# Allegro board LOA_09Jul25.brd
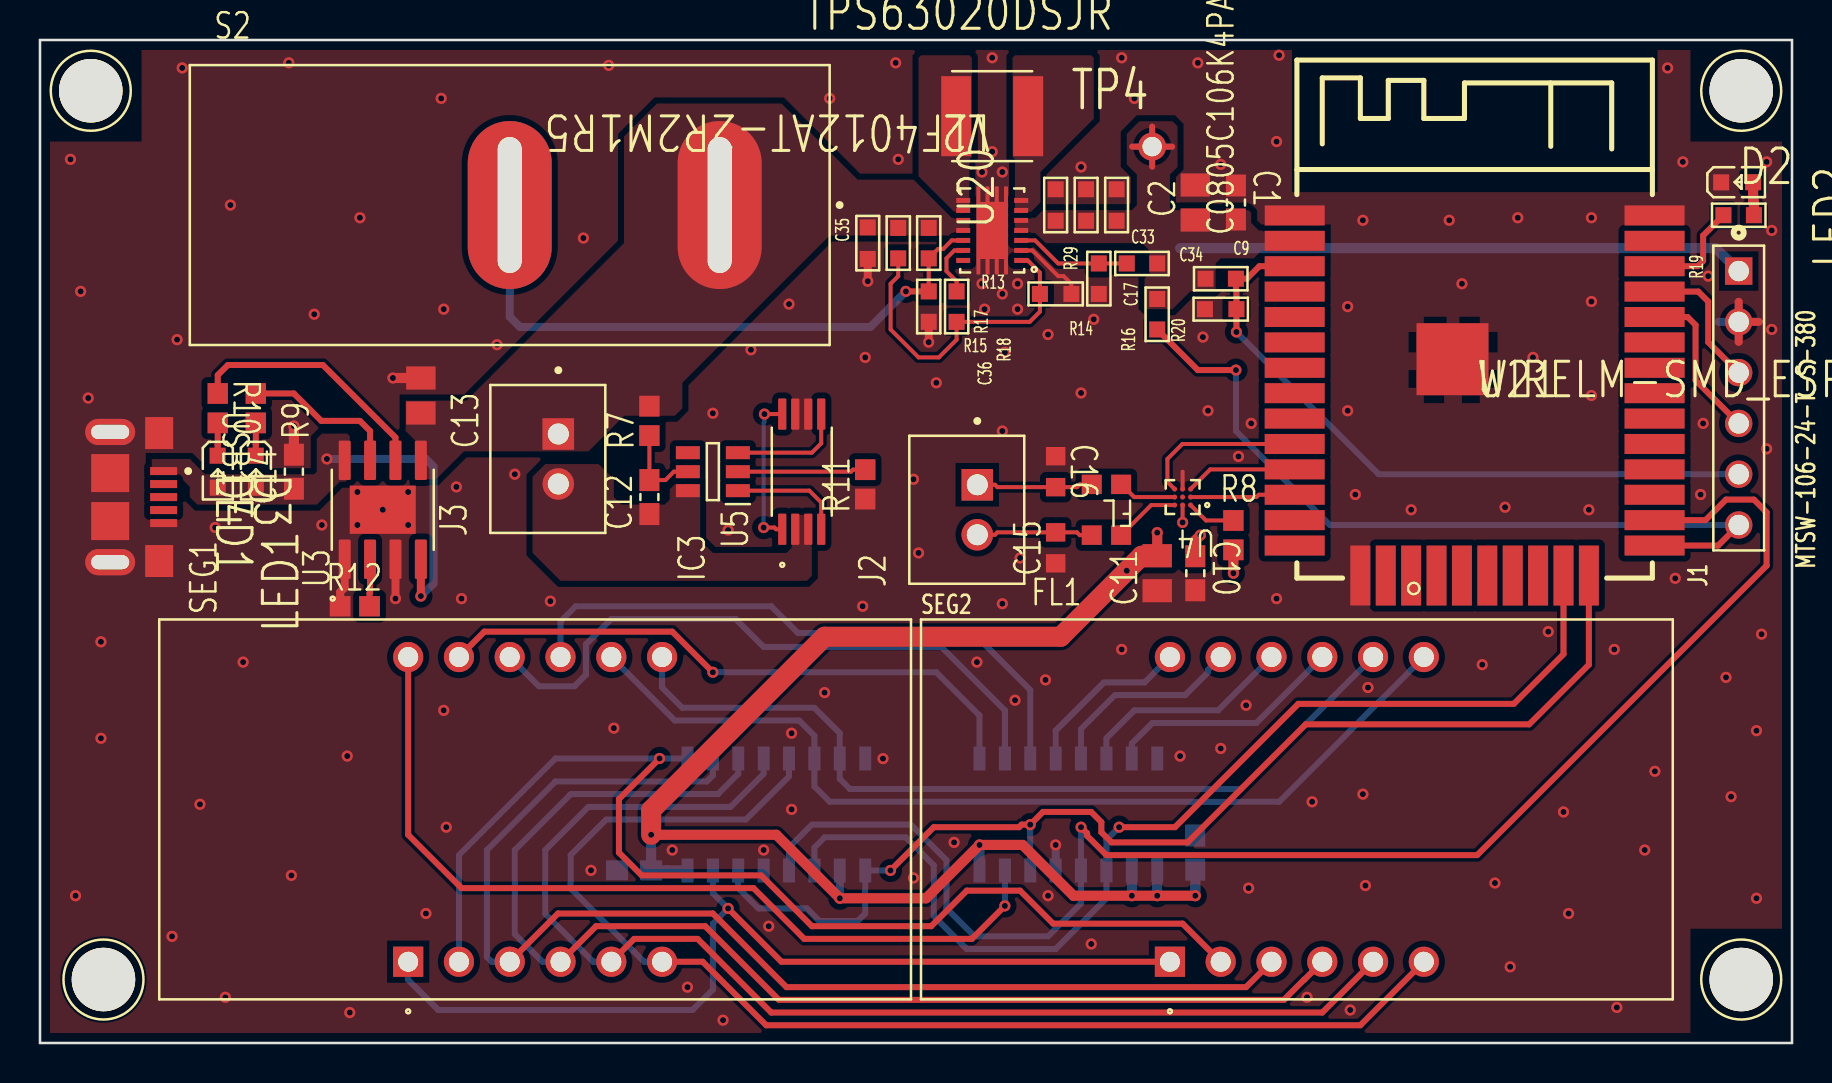
[diagram p0: board, top side]
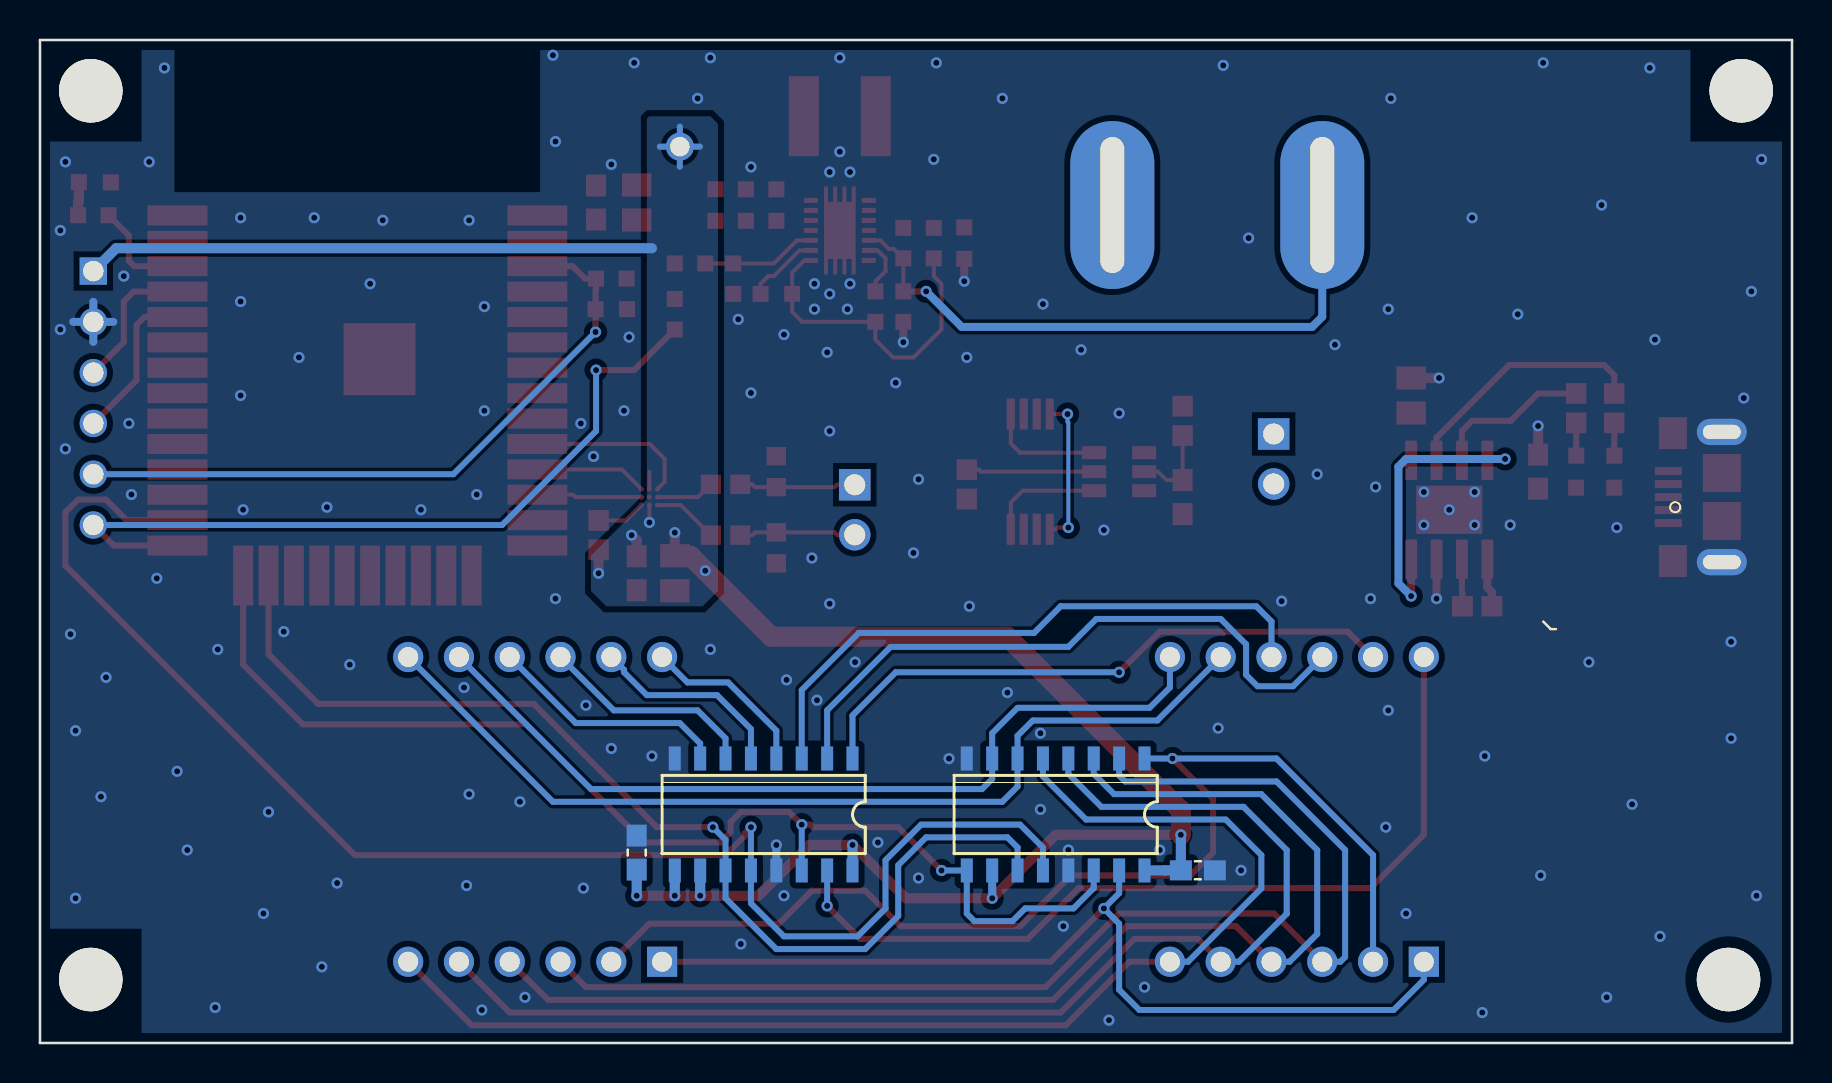
[diagram p1: board, bottom side, seen from below]

Outline 87.63 x 50.16 mm; copper layers: TOP, BOTTOM. Coordinates in mm from the lower left corner of the outline.
Outline path: 0,50.16 0,0 87.63,0 87.63,50.16 0,50.16

## Design rules (mm)
constraint set DEFAULT: min track width 0.3, pair gap 0.203

## Placement (name value [footprint] x y rotation side)
C1  C0603C104J3RACTU  [CAPC1608X90]  59.82 42.04 270 top
C2  C0805C106K4PAC  [CAPC2012X140N]  57.79 42.04 90 top
C3  C0603C104K3RACTU  [CAPC1608X90]  29.72 8.64 180 bottom
C4  C0603C104K3RACTU  [CAPC1608X90]  57.79 9.53 90 bottom
C9  100nF  [C0603]  59.84 36.7 180 top
C10  C0603C104J3RACTU  [CAPC1608X90]  57.79 23.5 270 top
C11  C0805C106K4PAC  [CAPC2012X140N]  55.88 23.5 90 top
C12  C0603C104J3RACTU  [CAPC1608X90]  30.48 27.3 90 top
C13  C0805C106K4PAC  [CAPC2012X140N]  19.05 32.38 270 top
C14  C0603C104J3RACTU  [CAPC1608X90]  12.7 28.57 90 top
C15  C0603C221J3GACTU  [CAPC1608X87N]  50.8 24.77 90 top
C16  C0603C221J3GACTU  [CAPC1608X87N]  50.8 28.57 270 top
C17  10uF 10V  [C0603]  50.8 41.12 90 top
C33  10uF 10V  [C0603]  52.32 41.12 90 top
C34  10uF 10V  [C0603]  53.85 41.12 90 top
C35  10uF 25V  [C0603]  41.4 40.79 270 top
C36  100nF 10V  [C0603]  50.01 37.46 0 top
D2  LED2  [LED0603-RD_RED]  84.89 43.05 0 top
D3  LED1  [LED0603-RD_RED]  10.79 28.57 270 top
D4  LED1  [LED0603-RD_RED]  8.89 28.57 270 top
FL  -  [BLM18AG121SN1D]  53.34 27.94 180 top
FL1  -  [BLM18AG121SN1D]  53.34 25.4 180 top
IC1  74HC595  [SO16]  36.83 11.43 0 bottom
IC3  DW01A-G  [SOT95P280X135-6N]  33.65 28.57 180 top
IC4  74HC595  [SO16]  51.43 11.43 0 bottom
J1  BBS-106-X-X  [SAMTEC_MTSW-106-24-T-S-380]  84.96 32.26 90 top
J2  B2B-XH-A_(LF)(SN)  [B2B-XH-A_LFSN]  46.35 26.67 90 top
J3  B2B-XH-A_(LF)(SN)  [B2B-XH-A_LFSN]  25.4 29.21 90 top
L2  VLF4012AT-2R2M1R5  [IND-SMD_L4_0-W4_0_LQH44PN2R2MP0L]  47.62 46.35 180 top
NOREF  -  []  -124.33 -104.01 0 top
NOREF#2  -  [unnamed#2]  3.17 3.18 270 top
NOREF#3  -  [unnamed#2]  85.09 47.62 270 top
NOREF#4  -  []  0 0 90 top
NOREF#5  -  [unnamed#2]  85.09 3.18 270 top
NOREF#6  -  [unnamed#2]  2.54 47.62 270 top
NOREF#7  -  []  0 0 0 top
R7  RC0603FR-07100RL  [RESC1607X60N]  30.48 31.11 90 top
R8  RC0603FR-071ML  [RESC1607X60N]  59.69 25.4 270 top
R9  RC0603FR-071KL  [RESC1607X60N]  10.79 31.75 270 top
R10  RC0603FR-071KL  [RESC1607X60N]  8.89 31.75 270 top
R11  RC0603FR-071KL  [RESC1607X60N]  41.27 27.94 90 top
R12  RC0603FR-071K2L  [RESC1607X60N]  15.75 21.84 0 top
R13  NC  [R0603]  44.45 39.24 90 top
R14  1M  [R0603]  54.36 38.99 0 top
R15  10K  [R0603]  44.45 36.07 90 top
R16  200K  [R0603]  52.96 37.46 90 top
R17  100  [R0603]  42.93 39.24 90 top
R18  0  [R0603]  45.85 36.07 90 top
R19  330  [R0603]  84.2 41.4 0 top
R20  10K  [R0603]  58.29 38.23 0 top
R29  10K  [R0603]  55.88 37.21 270 top
S2  RB141C1100  [SW_RB141C1100]  23.49 41.91 0 top
SEG1  LED 7 SEG  [LED_BA56-12SRWA]  24.77 11.68 0 top
SEG2  LED 7 SEG  [LED_BA56-12SRWA]  62.87 11.68 0 top
TP4  TP4  [TP]  55.63 44.83 180 top
U3  TP4056_U3  [SOP127P600X175-9N]  17.14 26.67 90 top
U4  MAX98357AEWL+T  [BGA9N40P3X3_134X143X69N]  57.15 27.3 180 top
U5  8205A-VB  [SOP65P640X120-8N]  38.1 28.57 90 top
U20  TPS63020DSJR  [VSON-14_L4_0-W3_0-P0_50-BL-EP_TI_DSJ]  47.62 40.64 90 top
U21  -  [WIRELM-SMD_ESP32-S]  71.76 32.38 0 top
USB1  2013499-1  [TE_2013499-1]  3.51 27.3 270 top

## Library data of the parts
C1 = C0603C104J3RACTU_C1
C2 = C0805C106K4PAC_C2
C3 = C0603C104K3RACTU_C3
C4 = C0603C104K3RACTU_C4
C9 C17 C33-C36 = CAP NP
C10 = C0603C104J3RACTU_C10
C11 = C0805C106K4PAC_C11
C12 = C0603C104J3RACTU_C12
C13 = C0805C106K4PAC_C13
C14 = C0603C104J3RACTU_C14
C15 = C0603C221J3GACTU_C15
C16 = C0603C221J3GACTU_C16
D2-D4 = LED
FL = BLM18AG121SN1D_FL
FL1 = BLM18AG121SN1D_FL1
IC1 IC4 = 74HC595_IC1_0
IC3 = DW01A-G_IC3
J1 = CON6
J2 = B2B-XH-A__LF__SN__J2
J3 = B2B-XH-A__LF__SN__J3
L2 = VLF4012AT-2R2M1R5
R7 = RC0603FR-07100RL_R7
R8 = RC0603FR-071ML_R8
R9 = RC0603FR-071KL_R9
R10 = RC0603FR-071KL_R10
R11 = RC0603FR-071KL_R11
R12 = RC0603FR-071K2L_R12
R13-R20 R29 = RESISTOR
S2 = RB141C1100
SEG1 SEG2 = Component_1_*1_0
TP4 = T POINT S
U3 = TP4056_U3_0
U4 = MAX98357AEWL+T_U4
U5 = 8205A-VB_U5
U20 = COPY_2
U21 = ESP32-WROOM-32D_0
USB1 = 2013499-1_USB1

## Footprints (pads in the part's own frame, mm; a bottom-side part is the same pattern mirrored in y, then rotated)
B2B-XH-A_LFSN
  rect 1.575x1.575 hole 1.05: 1(1.25,-0.525)
  round 1.575 hole 1.05: 2(-1.25,-0.525)
BGA9N40P3X3_134X143X69N
  round 0.25 smd: A1(-0.4,0.4) A2(0,0.4) A3(0.4,0.4) B1(-0.4,0) B2(0,0) B3(0.4,0) C1(-0.4,-0.4) C2(0,-0.4) C3(0.4,-0.4)
BLM18AG121SN1D
  rect 1x0.97 smd: 1(-0.735,0) 2(0.735,0)
C0603
  rect 0.8x0.8 smd: 1(0,0) 2(1.575,0)
CAPC1608X87N
  rect 0.92x0.97 smd: 1(-0.775,0) 2(0.775,0)
CAPC1608X90
  rect 1.1x1 smd: 1(-0.85,0) 2(0.85,0)
CAPC2012X140N
  rect 1.16x1.47 smd: 1(-0.875,0) 2(0.875,0)
IND-SMD_L4_0-W4_0_LQH44PN2R2MP0L
  rect 1.5x4 smd: 1(-1.8,0) 2(1.8,0)
LED0603-RD_RED
  rect 0.8x0.8 smd: 1(-0.8,-0.003) 2(0.799,0.004)
LED_BA56-12SRWA
  rect 1.508x1.508 hole 1: 1(-6.35,-7.62)
  round 1.508 hole 1: 2(-3.81,-7.62) 3(-1.27,-7.62) 4(1.27,-7.62) 5(3.81,-7.62) 6(6.35,-7.62) 7(6.35,7.62) 8(3.81,7.62) 9(1.27,7.62) 10(-1.27,7.62) 11(-3.81,7.62) 12(-6.35,7.62)
R0603
  rect 0.8x0.8 smd: 1(0,0) 2(1.524,0)
RESC1607X60N
  rect 1.04x1.02 smd: 1(-0.735,0) 2(0.735,0)
SAMTEC_MTSW-106-24-T-S-380
  rect 1.37x1.37 hole 1.02: 1(6.35,0)
  round 1.37 hole 1.02: 2(3.81,0) 3(1.27,0) 4(-1.27,0) 5(-3.81,0) 6(-6.35,0)
SO16
  rect 0.6x1.2 smd: 1(-4.445,-2.8) 2(-3.175,-2.8) 3(-1.905,-2.8) 4(-0.635,-2.8) 5(0.635,-2.8) 6(1.905,-2.8) 7(3.175,-2.8) 8(4.445,-2.8) 9(4.445,2.8) 10(3.175,2.8) 11(1.905,2.8) 12(0.635,2.8) 13(-0.635,2.8) 14(-1.905,2.8) 15(-3.175,2.8) 16(-4.445,2.8)
SOP65P640X120-8N
  custom 1.56x0.41 smd: 1(-2.88,0.975) 2(-2.88,0.325) 3(-2.88,-0.325) 4(-2.88,-0.975) 5(2.88,-0.975) 6(2.88,-0.325) 7(2.88,0.325) 8(2.88,0.975)
SOP127P600X175-9N
  custom 1.97x0.6 smd: 1(-2.475,1.905) 2(-2.475,0.635) 3(-2.475,-0.635) 4(-2.475,-1.905) 5(2.475,-1.905) 6(2.475,-0.635) 7(2.475,0.635) 8(2.475,1.905)
  rect 2.413x3.302 smd: 9(0,0)
SOT95P280X135-6N
  rect 1.2x0.65 smd: 1(-1.25,0.95) 2(-1.25,0) 3(-1.25,-0.95) 4(1.25,-0.95) 5(1.25,0) 6(1.25,0.95)
SW_RB141C1100
  oval 4.2x8.4 hole 1.2x6.8: 1(10.5,0) 2(0,0)
TE_2013499-1
  rect 0.4x1.35 smd: 1(-1.3,2.675) 2(-0.65,2.675) 3(0,2.675) 4(0.65,2.675) 5(1.3,2.675)
  rect 1.6x1.4 smd: SH1(-3.2,2.45) SH4(3.2,2.45)
  rect 1.9x1.9 smd: SH2(-1.2,0) SH3(1.2,0)
  oval 1.31x2.5 hole 0.71x1.9: SH5(3.255,0) SH6(-3.255,0)
TP
  round 1.397 hole 0.965: 1(0,0)
unnamed#2
  round 3.175 hole 3.2 unplated: (0,0)
VSON-14_L4_0-W3_0-P0_50-BL-EP_TI_DSJ
  rect 0.25x0.7 smd: 1(-1.5,-1.45) 2(-1,-1.45) 3(-0.5,-1.45) 4(0,-1.45) 5(0.5,-1.45) 6(1,-1.45) 7(1.5,-1.45) 8(1.5,1.45) 9(1,1.45) 10(0.5,1.45) 11(0,1.45) 12(-0.5,1.45) 13(-1,1.45) 14(-1.5,1.45)
  custom 4.4x1.58 smd: 15(0,0)
WIRELM-SMD_ESP32-S
  rect 3x1 smd: 1(-9,9.005) 2(-9,7.735) 3(-9,6.465) 4(-9,5.195) 5(-9,3.925) 6(-9,2.655) 7(-9,1.385) 8(-9,0.115) 9(-9,-1.155) 10(-9,-2.425) 11(-9,-3.695) 12(-9,-4.965) 13(-9,-6.235) 14(-9,-7.505) 25(9,-7.505) 26(9,-6.235) 27(9,-4.965) 28(9,-3.695) 29(9,-2.425) 30(9,-1.155) 31(9,0.115) 32(9,1.385) 33(9,2.655) 34(9,3.925) 35(9,5.195) 36(9,6.465) 37(9,7.735) 38(9,9.005)
  rect 1x3 smd: 15(-5.715,-9.005) 16(-4.445,-9.005) 17(-3.175,-9.005) 18(-1.905,-9.005) 19(-0.635,-9.005) 20(0.635,-9.005) 21(1.905,-9.005) 22(3.175,-9.005) 23(4.445,-9.005) 24(5.715,-9.005)
  rect 3.6x3.6 smd: 39(-1.105,1.815)

## Nets
+3V3: C1.2 C2.1 C3.1 C4.1 C10.1 C11.2 C17.1 C33.1 C34.1 IC1.10 IC1.16(VCC) IC4.9 IC4.10 IC4.16(VCC) J1.1 R8.2 R14.2 R20.1 R29.1 TP4.1(TP) U4.A2(VDD) U20.4 U20.5(VOUT2) U21.2
GND: C1.1 C2.2 C3.2 C4.2 C9.2 C10.2 C11.1 C13.1 C14.2 C15.1 C16.1 C17.2 C33.2 C34.2 C35.2 C36.2 D2.1(CATHODE) IC1.8 IC1.13 IC4.8 IC4.13 J1.2 R11.1 R12.1 R15.1 R16.1 U3.1 U3.3 U3.9 U4.C2 U5.6 U5.7(S23) U20.2 U20.15 U21.1 U21.15 U21.38 U21.39 USB1.5 USB1.SH1 USB1.SH2 USB1.SH3 USB1.SH4 USB1.SH5 USB1.SH6
+5: C14.1 D3.2 D4.2 U3.4(VCC) U3.8 USB1.1(VBUS)
BATT+: C13.2 C35.1 J3.1 R7.2 R13.2 R17.2 S2.1 U3.5 U20.10 U20.11
BATT-: C12.1 IC3.6 J3.2 U5.2 U5.3
BCLK: U4.C1 U21.11
CS: IC3.2 R11.2
D1: IC4.15 SEG1.12
D2: IC4.1 SEG1.11
D3: IC4.2 SEG1.10
D4: IC4.3 SEG1.9
D5: IC4.4 SEG2.12
D6: IC4.5 SEG2.11
D7: IC4.6 SEG2.10
D8: IC4.7 SEG2.9
DIN: U4.B1 U21.12
DIO: IC1.9 IC1.14 IC4.14 U21.24
ESP_BOOT: J1.6 R29.2 U21.25
ESP_EN: C9.1 J1.5 R20.2 U21.3
ESP_LED: R19.1 U21.36
G1: IC3.3 U5.5
G2: IC3.1 U5.4
LRC: U4.C3 U21.10
PWR_EN: R13.1 R15.2 S2.2 U20.12
RCLK: IC1.12 IC4.12 U21.26
SCLK: IC1.11 IC4.11 U21.23
SD: R8.1 U4.A1
U0RXD: J1.4 U21.34
U0TXD: J1.3 U21.35(TXD0)
N00271: IC1.6 SEG1.8 SEG2.7
N00279: IC1.7 SEG1.7 SEG2.8
N00393: FL.1 U4.B3
N00395: FL1.1 U4.A3
N00411: IC1.1 SEG1.2 SEG2.2
N00417: IC1.2 SEG1.3(P) SEG2.3(P)
N00423: IC1.15 SEG1.1 SEG2.1
N00429: IC1.3 SEG1.4 SEG2.4
N00431: IC1.4 SEG1.5 SEG2.5
N00433: IC1.5 SEG1.6 SEG2.6
N00511: D3.1(CATHODE) R9.2
N00513: D4.1(CATHODE) R10.2
N00523: R10.1 U3.6
N00529: R9.1 U3.7
N00547: R12.2 U3.2
N00607: C12.2 IC3.5(VCC) R7.1
N00647: C15.2 FL1.2 J2.2
N00649: C16.2 FL.2 J2.1
N011813: U5.1 U5.8
N420839: R14.1 R16.2 U20.3
N421111: L2.1 U20.6 U20.7
N421115: L2.2 U20.8 U20.9
N421175: R18.2 U20.13
N421245: C36.1 R17.1 R18.1 U20.1
N578148: D2.2 R19.2

Pads without a net: IC3 4; U4 B2; U20 14; U21 4 5 6 7 8 9 13 14 16 17 18 19 20 21 22 27 28 29 30 31 32 33 37; USB1 2 3 4

## Via types
v1: diameter 0.559, hole 0.305, TOP to BOTTOM, 178 vias

## Routing (per net, layer and track width the routed paths; a pad name or vN(x,y) marks a point on that pad's centre or on a via; arc(x,y) is an arc through that point)
+3V3: length 113.4
  TOP w0.2: U4.A2 v1(57.15,26.04)
  TOP w0.3: TP4.1 56.63,44.83 ; TP4.1 55.63,45.83 ; TP4.1 55.63,43.83 ; TP4.1 54.62,44.83
  TOP w0.508: v1(30.57,10.41) 36.83,10.41 v1(40,7.24) 44.32,7.24 v1(46.99,9.91) 49.15,9.91 51.69,7.37 v1(54.61,7.37) v1(55.88,7.37) v1(57.79,7.37) ; R8.2 v1(59.69,23.5) ; C10.1 57.79,25.15 v1(58.04,25.4) ; C11.2 v1(55.88,25.53)
  TOP w1: v1(30.57,10.41) 30.57,11.64 39.24,20.32 51.05,20.32 v1(54.36,23.62) 55.1,24.37 C11.2
  BOTTOM w0.3: 54.62,44.83 TP4.1 ; TP4.1 55.63,45.83 ; TP4.1 55.63,43.83 ; TP4.1 56.63,44.83
  BOTTOM w0.4: IC1.10 v1(40,7.24)
  BOTTOM w0.508: 57.02,39.75 83.82,39.75 J1.1 ; IC4.16 v1(46.99,9.91) ; 57.79,8.67 v1(57.79,7.37) ; 55.88,8.63 v1(55.88,7.37) ; IC1.16 31.38,8.63 31.37,8.64 C3.1 v1(30.57,10.41) ; IC4.10 v1(54.61,7.37)
GND: length 22.2
  TOP w0.2: U20.2 49.64,39.64 50.93,38.35 51.2,38.35 51.59,37.97 C36.2 ; 57.15,27.71 57.15,28.57
  TOP w0.4: J1.2 85.96,36.07 ; J1.2 84.96,37.07 ; J1.2 84.96,35.07 ; C35.2 v1(41.4,38.1) ; R15.1 v1(44.45,35.05) ; U3.3 v1(17.78,22.23) ; 15.24,24.2 15.24,22.78 15.01,22.55 R12.1
  TOP w0.508: C14.2 v1(12.7,30.86) ; C13.1 v1(17.65,33.26)
  BOTTOM w0.4: IC4.13 v1(50.8,9.91) ; J1.2 84.96,37.07 ; J1.2 85.96,36.07 ; J1.2 84.96,35.07 ; J1.2 83.96,36.07
  vias: v1(1.52,44.2) v1(1.78,7.37) v1(2.03,37.59) v1(2.41,32.26) v1(3.05,20.07) v1(3.05,15.24) v1(6.6,5.33) v1(6.86,35.18) v1(7.11,48.77) v1(8,11.94) v1(8.76,25.78) v1(9.27,2.29) v1(9.53,41.91) v1(10.16,19.05) v1(12.45,49.02) v1(12.57,8.38) v1(13.72,36.45) v1(14.1,25.91) v1(15.37,14.35) v1(15.49,1.52) v1(15.87,27.56) v1(15.87,25.91) v1(16,41.27) v1(17.14,26.67) v1(18.41,27.56) v1(18.41,25.91) v1(19.3,6.48) v1(20.07,47.24) v1(20.19,36.7) v1(20.19,16.64) v1(20.32,10.79) v1(20.83,27.81) v1(21.08,22.23) v1(22.86,34.92) v1(23.75,28.45) v1(25.53,22.1) v1(27.18,40.26) v1(27.56,8.64) v1(28.45,48.89) v1(28.7,15.75) v1(31.62,9.65) v1(32.38,2.79) v1(33.65,31.5) v1(34.16,1.14) v1(34.42,25.65) v1(35.56,34.67) v1(36.2,9.65) v1(36.45,5.84) v1(37.46,36.96) v1(37.59,15.49) v1(37.59,11.68) v1(39.24,17.53) v1(39.5,47.24) v1(41.15,21.84) v1(41.27,34.29) v1(42.16,14.22) v1(42.8,49.02) v1(42.93,44.2) v1(43.69,28.19) v1(43.69,8.25) v1(43.94,24.51) v1(44.83,33.02) v1(45.72,10.03) v1(46.86,19.05) v1(47.12,43.56) v1(47.12,37.97) v1(47.24,36.7) v1(47.62,49.28) v1(47.62,44.58) v1(48.13,43.56) v1(48.13,37.46) v1(48.13,30.61) v1(48.13,21.97) v1(48.26,34.54) v1(48.77,17.14) v1(48.89,37.97) v1(48.89,36.7) v1(49.02,24.26) v1(50.29,18.16) v1(50.42,35.43) v1(50.42,7.37) v1(52.07,43.81) v1(52.07,32.51) v1(52.58,4.95) v1(52.7,36.2) v1(54.1,49.28) v1(54.1,19.69) v1(54.74,47.24) v1(57.02,14.35) v1(57.91,49.02) v1(58.17,35.31) v1(58.42,31.62) v1(59.05,43.94) v1(59.05,14.73) v1(59.94,29.34) v1(60.32,16.89) v1(60.45,7.75) v1(60.58,30.99) v1(61.85,45.09) v1(61.85,22.23) v1(61.98,49.4) v1(63.37,2.29) v1(63.63,12.06) v1(65.41,36.83) v1(65.41,31.62) v1(65.53,1.65) v1(65.79,27.43) v1(66.17,41.15) v1(66.17,12.45) v1(66.29,7.87) v1(66.42,17.78) v1(68.58,26.67) v1(70.48,41.15) v1(71.12,37.97) v1(72.14,18.92) v1(72.77,8) v1(73.28,26.8) v1(73.53,3.81) v1(73.91,41.27) v1(74.68,34.29) v1(75.44,20.57) v1(76.2,11.56) v1(76.45,6.48) v1(77.47,26.67) v1(77.6,41.27) v1(77.6,37.08) v1(77.6,32.38) v1(78.74,19.69) v1(78.87,1.78) v1(80.26,9.65) v1(80.77,13.59) v1(81.41,48.77) v1(81.79,23.24) v1(82.17,44.07) v1(83.06,27.43) v1(83.19,30.99) v1(83.44,38.35) v1(84.33,18.29) v1(84.58,12.32) v1(85.85,15.62) v1(85.85,7.24) v1(86.11,20.45) v1(86.36,44.07) v1(86.36,29.72) v1(86.61,40.64) v1(86.61,35.69)
+5: length 14.1
  TOP w0.4: U3.4 v1(19.05,22.35)
  BOTTOM w0.4: v1(19.05,22.35) 19.69,22.99 19.69,28.83 19.3,29.21 v1(14.35,29.21)
BCLK: length 5.6
  TOP w0.2: U21.11 58.54,28.69 57.55,27.71
CS: length 6.4
  TOP w0.2: R11.2 40.66,28.68 40.56,28.57 IC3.2
D1: length 43.3
  TOP w0.3: v1(48.26,6.86) 46.61,5.21 38.23,5.21 35.69,7.75 21.08,7.75 18.41,10.41 SEG1.12
  BOTTOM w0.3: v1(48.26,6.86) IC4.15
D2: length 30.5
  TOP w0.3: SEG1.11 22.23,20.57 31.62,20.57 v1(33.65,18.54)
  BOTTOM w0.3: v1(33.65,18.54) 44.83,18.54 46.99,16.38 IC4.1
D3: length 32
  BOTTOM w0.3: SEG1.10 24.96,17.84 26.73,17.84 27.3,18.42 27.3,19.94 28.57,21.21 34.8,21.21 36.2,19.81 45.09,19.81 48.26,16.64 IC4.2
D4: length 30.7
  BOTTOM w0.3: SEG1.9 26.03,21.08 26.8,21.84 36.58,21.84 37.91,20.51 46.67,20.51 49.53,17.65 IC4.3
D5: length 8.6
  BOTTOM w0.3: SEG2.12 55.24,18.03 53.21,18.03 50.8,15.62 IC4.4
D6: length 10
  BOTTOM w0.3: IC4.5 52.07,15.7 53.77,17.4 57.28,17.4 58.42,18.54 58.42,18.66 SEG2.11
D7: length 10.9
  BOTTOM w0.3: SEG2.10 58.93,16.64 54.74,16.64 53.34,15.24 IC4.6
D8: length 12.1
  BOTTOM w0.3: SEG2.9 60.83,16 55.63,16 54.61,14.98 IC4.7
DIN: length 5.3
  TOP w0.2: U4.B1 60.84,27.3 60.96,27.42 U21.12
DIO: length 59
  TOP w0.3: 77.47,23.38 77.47,18.92 74.49,15.94 63.31,15.94 57.4,10.03 53.59,10.03 53.09,10.54 53.09,11.05 52.58,11.56 50.16,11.56 v1(49.53,10.92) 49.1,10.92 48.97,10.79 44.7,10.79 v1(42.54,8.63)
  BOTTOM w0.3: IC1.14 34.92,7.75 35.94,6.73 38.35,6.73 38.99,6.1 40.89,6.1 41.27,6.48 IC1.9 v1(42.54,8.63) ; IC4.14 v1(49.53,10.92)
ESP_BOOT: length 39.6
  TOP w0.3: U21.25 83.94,24.88 J1.6 ; v1(59.82,33.66) 57.91,33.66 R29.2
  BOTTOM w0.3: v1(59.82,33.66) 59.82,30.61 64.52,25.91 J1.6
ESP_EN: length 33.9
  TOP w0.3: U21.3 60.99,38.85 60.37,38.23 R20.2 59.82,37.68 59.84,37.65 C9.1 v1(59.84,35.56)
  BOTTOM w0.3: J1.5 66.95,28.45 v1(59.84,35.56)
ESP_LED: length 5.2
  TOP w0.3: U21.36 82.92,38.85 83.19,39.12 83.19,40.39 R19.1
G1: length 5.8
  TOP w0.2: U5.5 39.07,29.99 38.61,29.53 IC3.3
G2: length 5.8
  TOP w0.2: U5.4 39.07,27.03 38.48,27.62 IC3.1
LRC: length 8.3
  TOP w0.2: 56.75,27.71 56.39,28.07 56.39,29.21 57.14,29.96 U21.10
PWR_EN: length 31.2
  TOP w0.2: R15.2 R13.1 44.92,39.71 45.17,39.71 45.6,40.14 U20.12
  TOP w0.3: R15.2 v1(43.31,37.59)
  BOTTOM w0.4: v1(43.31,37.59) 41.53,35.81 24,35.81 23.49,36.32 S2.2
RCLK: length 74.3
  TOP w0.3: v1(52.07,10.79) 52.37,10.49 52.37,10.36 53.34,9.4 71.88,9.4 86.36,23.88 86.36,26.54 85.73,27.18 84.33,27.18 83.3,26.15 U21.26
  BOTTOM w0.3: IC1.12 37.46,9.78 38.61,10.92 43.56,10.92 45.34,9.14 45.34,6.73 46.74,5.33 50.42,5.33 52.07,6.98 IC4.12 v1(52.07,10.79)
SCLK: length 54.4
  TOP w0.3: U21.23 76.2,19.45 73.71,16.96 62.94,16.96 56.77,10.79 v1(53.97,10.79)
  BOTTOM w0.3: IC1.11 38.73,9.78 39.24,10.29 43.31,10.29 44.7,8.89 44.7,6.35 46.35,4.7 50.8,4.7 53.34,7.24 IC4.11 53.34,10.16 v1(53.97,10.79)
SD: length 2.5
  TOP w0.2: U4.A1 58.32,26.14 R8.1
U0RXD: length 8
  TOP w0.3: J1.4 82.8,33.15 82.8,35.91 82.41,36.31 U21.34
U0TXD: length 7.1
  TOP w0.3: U21.35 82.94,37.58 83.44,37.08 83.44,35.05 J1.3
N00271: length 48.1
  BOTTOM w0.3: SEG2.7 61.98,12.06 39.5,12.06 38.73,12.83 IC1.6 38.73,15.37 37.97,16.13 31.75,16.13 SEG1.8
N00279: length 43.3
  BOTTOM w0.3: SEG2.8 60.07,12.7 40.51,12.7 40,13.21 IC1.7 40,15.49 38.73,16.76 32.13,16.76 31.11,17.78 SEG1.7
N00393: length 2.9
  TOP w0.2: U4.B3 54.72,27.3 54.09,27.94 FL.1
N00395: length 3.3
  TOP w0.2: U4.A3 55.58,26.91 FL1.1
N00411: length 58.1
  TOP w0.3: SEG2.2 57.15,5.97 50.67,5.97 49.02,7.62 46.35,7.62 44.58,5.84 38.61,5.84 36.07,8.38 30.1,8.38 28.96,9.53 28.96,12.2 v1(30.99,14.23)
  BOTTOM w0.3: IC1.1 v1(30.99,14.23) 25.79,14.23 20.95,9.4 SEG1.2
N00417: length 61.4
  TOP w0.3: SEG2.3 60.32,2.79 37.34,2.79 33.65,6.48 25.91,6.48 SEG1.3
  BOTTOM w0.3: SEG1.3 22.59,4.06 22.35,4.3 22.35,9.65 25.78,13.08 33.35,13.08 33.65,13.38 IC1.2
N00423: length 47
  TOP w0.3: v1(34.42,6.73) 37.08,4.06 SEG2.1
  BOTTOM w0.3: IC1.15 33.65,7.49 v1(34.42,6.73) 33.65,5.97 33.65,2.67 32.64,1.65 19.92,1.65 18.41,3.16 SEG1.1
N00429: length 61.7
  TOP w0.3: SEG1.4 27.81,5.84 33.27,5.84 36.96,2.16 62.21,2.16 63.23,3.18 63.25,3.18 SEG2.4
  BOTTOM w0.3: IC1.3 34.92,13.46 33.91,12.45 26.54,12.45 23.75,9.65 23.75,5.45 25.13,4.06 SEG1.4
N00431: length 61.9
  TOP w0.3: SEG1.5 29.72,5.21 32.89,5.21 36.58,1.52 64.14,1.52 SEG2.5
  BOTTOM w0.3: SEG1.5 27.67,4.06 25.27,6.46 25.27,9.65 27.43,11.81 34.54,11.81 36.2,13.46 IC1.4
N00433: length 61.9
  TOP w0.3: SEG1.6 33.15,4.06 36.32,0.89 66.04,0.89 SEG2.6
  BOTTOM w0.3: IC1.5 37.46,13.33 35.31,11.18 28.32,11.18 26.54,9.4 26.54,7.73 30.21,4.06 SEG1.6
N00511: length 1.6
  TOP w0.3: D3.1 10.79,29.92 10.79,29.93 R9.2
N00513: length 1.6
  TOP w0.3: R10.2 8.89,29.93 8.89,29.92 D4.1
N00523: length 12.7
  TOP w0.3: U3.6 17.78,30.28 14.15,33.91 9.4,33.91 8.89,33.4 R10.1
N00529: length 8
  TOP w0.3: U3.7 16.51,30.61 16,31.11 14.07,31.11 12.7,32.48 R9.1
N00547: length 2.4
  TOP w0.3: R12.2 16.48,22.5 16.51,22.53 U3.2
N00607: length 4.3
  TOP w0.2: IC3.5 31.7,28.57 31.28,28.16 C12.2 R7.1
N00647: length 5.8
  TOP w0.2: FL1.2 52,25.4 51.86,25.54 C15.2 47.89,25.54 47.77,25.42 J2.2
N00649: length 5.8
  TOP w0.2: FL.2 52,27.94 51.86,27.8 C16.2 47.89,27.8 47.77,27.92 J2.1
N011813: length 7.5
  TOP w0.2: U5.8 v1(36.24,31.46) ; U5.1 36.82,25.7 36.73,25.78 v1(36.2,25.78)
  BOTTOM w0.2: v1(36.2,25.78) 36.2,31.03 36.24,31.08 v1(36.24,31.46)
N420839: length 5.8
  TOP w0.2: R14.1 R16.2 50.93,38.99 49.78,40.14 U20.3
N421175: length 2.9
  TOP w0.2: R18.2 45.85,38.09 45.34,38.6 45.34,39.24 45.74,39.64 U20.13
N421245: length 16.4
  TOP w0.2: U20.1 49.4,39.14 50.01,38.53 C36.1 50.01,36.58 49.5,36.07 R18.1 45.85,35.18 44.96,34.29 43.94,34.29 42.54,35.69 42.54,37.97 42.93,38.35 R17.1
N578148: length 1.7
  TOP w0.508: R19.2 85.73,42.06 85.68,42.1 D2.2

## Copper pours and planes (outline as drawn; the poured copper is in the pictures)
+3V3 on TOP: 48.77,41.27 48.77,40.51 49.78,40.51 50.29,40 55.12,40 55.5,39.62 55.5,38.48 55.24,38.23 55.24,36.83 55.37,36.7 56.64,36.7 57.53,37.59 58.67,37.59 58.8,37.72 58.8,38.99 59.05,39.24 60.71,39.24 61.09,39.62 64.26,39.62 64.26,40.64 60.96,40.64 60.58,41.02 60.58,41.53 60.45,41.66 56.64,41.66 56.51,41.78 56.51,43.43 56.9,43.81 56.9,45.85 56.64,46.1 54.99,46.1 54.36,45.47 54.36,43.94 54.86,43.43 54.86,41.91 54.61,41.66 50.16,41.66 49.78,41.27
+3V3 on BOTTOM: 60.07,24.38 60.07,22.61 59.31,21.84 54.48,21.84 53.72,22.61 53.72,45.97 54.1,46.35 57.15,46.35 57.28,46.23 57.28,27.18
GND on TOP: 82.55,0.5 0.5,0.5 0.5,45.09 5.08,45.09 5.08,49.66 82.55,49.66 82.55,45.09 87.13,45.09 87.13,5.71 82.55,5.71 ; 13 cut-outs
GND on BOTTOM: 82.55,0.5 0.5,0.5 0.5,45.09 5.08,45.09 5.08,49.66 82.55,49.66 82.55,45.09 87.13,45.09 87.13,5.71 82.55,5.71 ; 12 cut-outs
+5 on TOP: 5.59,29.21 7.49,29.21 8.26,28.45 13.72,28.45 13.84,28.57 13.84,30.23 14.1,30.48 15.37,30.48 15.49,30.35 15.49,28.19 15.37,28.07 14.99,28.07 13.84,26.92 7.87,26.92 7.49,27.3 7.49,27.81 6.86,28.45 5.59,28.45
BATT+ on TOP: 18.8,28.19 18.8,30.1 18.29,30.61 18.29,32.13 21.34,32.13 29.21,40 29.21,45.34 30.86,46.99 37.08,46.99 40.89,43.18 43.69,43.18 45.59,41.27 46.48,41.27 46.48,40.51 45.59,40.51 45.47,40.39 39.5,40.39 32.13,33.02 32.13,31.75 31.75,31.37 29.21,31.37 27.43,29.59 21.21,29.59 19.81,28.19
BATT- on TOP: 28.7,28.19 28.7,27.3 29.08,26.92 31.24,26.92 31.5,27.18 31.5,27.69 31.75,27.94 33.02,27.94 33.02,25.15 33.65,24.51 37.34,24.51 37.59,24.77 37.59,26.42 38.61,26.42 38.61,23.37 38.35,23.11 26.03,23.11 24.64,24.51 24.64,28.32 25.27,28.96 27.94,28.96
N421111 on TOP: 52.58,49.4 52.7,49.28 52.7,46.23 50.04,43.56 50.04,42.04 49.53,41.53 48.77,41.53 48.77,44.2 48.64,44.32 48.64,49.28 48.77,49.4
N421115 on TOP: 46.61,49.28 46.61,44.32 46.48,44.2 46.48,41.53 45.72,41.53 43.94,43.31 43.94,49.28 44.07,49.4 46.48,49.4

## Text on the board
User.43: 1.6 MM | +/- 10% | L02   SIGNAL         1.5 OZ. | SOLDER MASK | SILK SCREEN | SECONDARY SIDE | LAYER STACKUP | COPPER    SINGLE ENDED          DIFFERENTIAL | ARTWORK               TYPE        THICKNESS  WIDTH" IMPEDANCE      WIDTH" IMPEDANCE | ----------------------------------------------------------------------------------- | PRIMARY SIDE | L01   SIGNAL         1.5 OZ. | NOTES: (UNLESS OTHERWISE SPECIFIED) | MATERIALS: | A. ALL EXPOSED CONDUCTIVE PATTERN AREAS NOT COVERED WITH SOLDERMASK OR | SUPPLIED DATA.  INCH DIMENSIONS ARE FOR REFERENCE ONLY. | B. APPLY GREEN SOLDER MASK PER IPC-SM-840, CLASS H, | FABRICATE PCB IN ACCORDANCE WITH IPC-6012, CLASS 2; PER IPC-6011 USING | CUSTOMER SUPPLIED DATA FILES. | C. SILKSCREEN OVER SOLDER MASK WITH PERMANENT, | MILLIMETERS (MM) ARE THE CONTROLLING DIMENSIONS FOR THE DRAWINGS AND | FINISH: | THIEVING: | ALL HOLES SHALL BE LOCATED WITHIN +/-0.2mm OF TRUE POSITION. | B. PREPREG SHALL BE ISOLA 370HR. | A. LAMINATE SHALL BE ISOLA 370HR. | C. ALL COPPER THICKNESS IS 1/2 OZ. BEFORE PLATING. | LAYER-TO-LAYER REGISTRATION SHALL BE WITHIN +/-0.2mm. | TOLERANCES: | REMOVE ALL UNUSED PADS ON INNER LAYERS. | D. SURFACE MOUNT PAD PLATING MUST BE FLAT TO A MAXIMUM OF 0.08 ABOVE | A. WARP OR TWIST OF BOARD SHALL NOT EXCEED 1% | C. REMOVE ALL BURRS AND BREAK SHARP EDGES 0.4 MAXIMUM. | E. 1.5 MAXIMUM RADIUS ON ANY INSIDE CORNERS. | B. CONDUCTOR WIDTHS AND SPACING SHALL BE WITHIN +/- 0.02 OF GERBER DATA. | A. SUPPLIER MAY ADD COPPER THIEVING TO COMPENSATE FOR LOW COPPER | B. COPPER THIEVING SHALL NOT INTERFERE WITH IMPEDANCE CONTROLLED TRACES. | OTHER PLATING SHALL BE PLATED WITH HASL. | TO BOTH SIDES OF THE BOARD OVER BARE COPPER. VIA HOLES | COVERED WITH SOLDERMASK DO NOT NEED TO BE PLUGGED. | HIGH TEMPERATURE, NONCONDUCTIVE, WHITE INK PER A-A-56032, TYPE II. | ANY CONDUCTIVE AREA AND BOARD EDGE. | DENSITY AREAS WHERE NECESSARY. KEEP THIEVING .127mm (.050") AWAY FROM | BOARD SURFACE. | 3. | 2. | 1. | 5. | 4. | 7. | 8. | 6.
User.45: FIGURE | FINISHED_SIZE | 0.3048 | 0.9652 | 1.0 | 1.02 | 1.05 | 3.1999 | 1.9x0.71 | 6.8x1.2 | DRILL CHART: TOP to BOTTOM | ALL UNITS ARE IN MILLIMETERS | ROTATION | - | 0.000 | 90.000 | PLATED | NON-PLATED | QTY | 178 | 1 | 24 | 6 | 4 | 2
